# Altium PCB FRONT-UNIT.PcbDoc
Units mm, origin at the board's own origin, x right, y up, seen from the top; angles counter-clockwise.
Board outline 187.14 x 77.14 mm, 2 copper layers (Top Layer, Top, Bottom Layer, Bottom); 72 components, 64 nets, 317 pads, 87 vias.
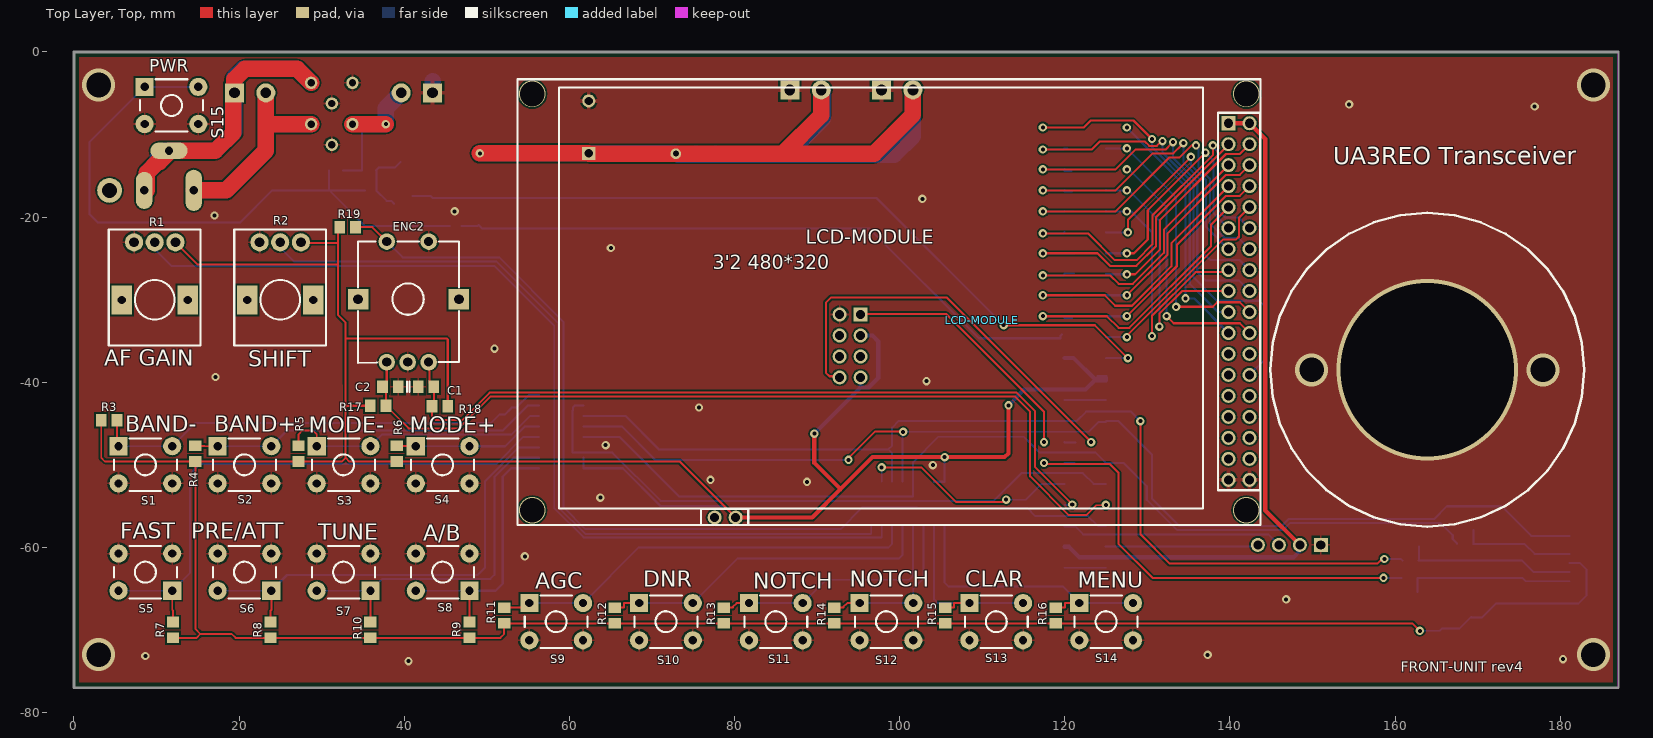
[diagram p0: Top Layer, Top view]
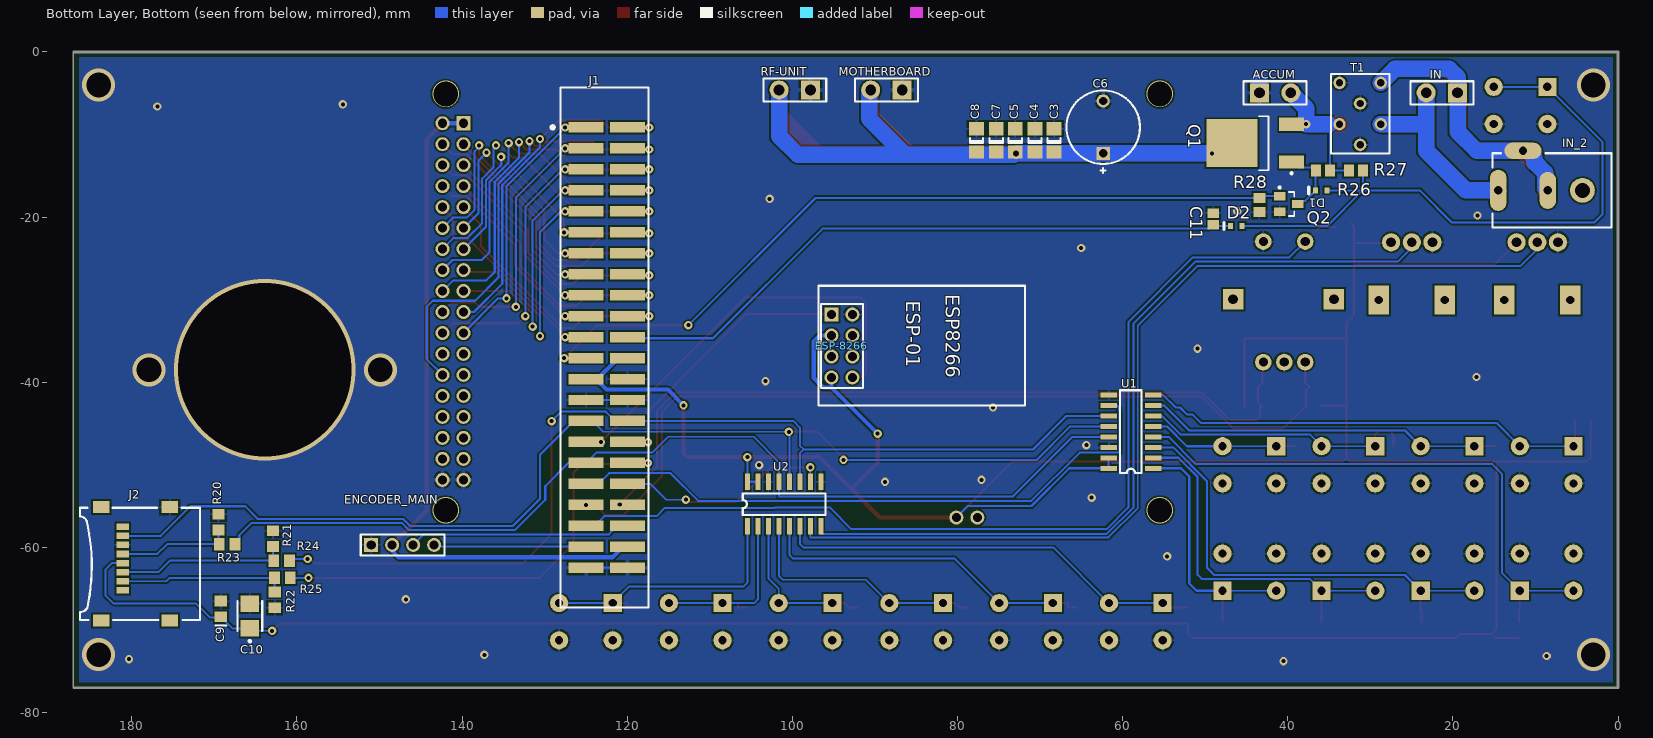
[diagram p1: Bottom Layer, Bottom view, seen from below]

## Layer stack, top to bottom
Top Solder, Top Mask: solder mask 0.0102, Solder Resist, Dk 3.5
Top Layer, Top: signal copper 0.0356
Dielectric 1: dielectric 0.32, FR-4, Dk 4.8
Bottom Layer, Bottom: signal copper 0.0356
Bottom Solder, Bot Mask: solder mask 0.0102, Solder Resist, Dk 3.5

## Board outline
-0.07,-77 ccw(c0,-77) 0,-77.07 ccw(c0,-77) 0.03,-77.064 ccw(c0,-77) 0.07,-77 0.07,0 ccw(c0,0) 0.03,0.064 ccw(c0,0) 0,0.07 187,0.07 cw(c187,0) 187.07,0 cw(c187,0) 187.064,-0.03 cw(c187,0) 187,-0.07 0,-0.07 cw(c0,0) -0.064,-0.03 cw(c0,0) -0.07,0 cw(c0,0) 0,0.07 0,0.064 187,0.064 cw(c187,0) 187.064,0 187.064,-77 ccw(c187,-77) 187,-76.936 0,-76.936 ccw(c0,-77) -0.064,-77 -0.064,0 cw(c0,0) 0,0.064 cw(c0,0) 0.064,0 0.064,-77 cw(c0,-77) 0,-77.064 187,-77.064 ccw(c187,-77) 187.064,-77 187.07,-77 ccw(c187,-77) 187.064,-76.97 ccw(c187,-77) 187,-76.93 0,-76.93 ccw(c0,-77) -0.064,-76.97 ccw(c0,-77)

## Design rules (kind name [scope] priority, off if disabled: settings)
BoardOutlineClearance [All] p1: gap=0.2 ignorepadtopadclearanceinfootprint=FALSE except(0.4: Arc-SplitBarrior Arc-SplitContinuation Track-SplitBarrior Track-SplitContinuation SMDPad-SplitBarrior SMDPad-SplitContinuation THPad-SplitBarrior THPad-SplitContinuation Via-SplitBarrior Via-SplitContinuation Fill-SplitBarrior Fill-SplitContinuation Poly-SplitBarrior Poly-SplitContinuation Region-SplitBarrior Region-SplitContinuation Text-SplitBarrior Text-SplitContinuation)
Clearance "Clearance Bottom Layer" [OnLayer('Bottom Layer')] p1: gap=0.203 ignorepadtopadclearanceinfootprint=TRUE except(0.254: Arc-Text Track-Text SMDPad-Text THPad-Text Via-Text Fill-Text Poly-Text Region-Text Text-Text)
Clearance "Clearance Top Layer" [OnLayer('Top Layer')] p2: gap=0.203 ignorepadtopadclearanceinfootprint=TRUE except(0.254: Arc-Text Track-Text SMDPad-Text THPad-Text Via-Text Fill-Text Poly-Text Region-Text Text-Text)
Clearance [All] p3: gap=0.2 ignorepadtopadclearanceinfootprint=FALSE except(0.089: Arc-Arc Arc-Track Arc-SMDPad Track-Track Track-SMDPad SMDPad-SMDPad; 0.127: Arc-Via Track-Via SMDPad-Via THPad-Via Via-Via; 0.254: Arc-Text Track-Text SMDPad-Text THPad-Text Via-Text Fill-Text Poly-Text Region-Text Text-Text)
HoleSize [All] p1: absolutevalues=TRUE maxlimit=2 minlimit=0.486 maxpercent=80.000 minpercent=20.000
MinimumAnnularRing [All] p1: minimumring=0.076
MinimumSolderMaskSliver [All] p1: minsoldermaskwidth=0.01
PolygonConnect PolygonConnect_1 [All] p1: thpad.connectstyle=Relief thpad.reliefconductorwidth=0.508 thpad.reliefentries=4 thpad.polygonreliefangle="90 Angle" thpad.airgapwidth=0.254 smdpad.connectstyle=Relief smdpad.reliefconductorwidth=0.508 smdpad.reliefentries=4 smdpad.polygonreliefangle="90 Angle" smdpad.airgapwidth=0.254 via.connectstyle=Direct via.reliefconductorwidth=0.508 via.reliefentries=4 via.polygonreliefangle="90 Angle" via.airgapwidth=0.254
RoutingCorners [All] p1: cornerstyle=Round minsetback=2.54 maxsetback=2.54
RoutingVias [All] p1: holewidth=0.5 width=1 viastyle="Through Hole" minholewidth=0.2 minwidth=0.45 maxholewidth=1 maxwidth=2
SilkToSilkClearance [All] p1: silktosilkclearance=0.1
SilkToSolderMaskClearance [IsPad] p1: minsilkscreentomaskgap=0.1 clearancetoexposedcopper=TRUE
SolderMaskExpansion [All] p1: expansion=0.102
Width [All] p1: maxlimit=2.54 minlimit=0.089 preferedwidth=0.381
25 further rules are at their usual default settings.

## Components (designator, comment, footprint, x,y, rotation, side; value= is the part's Value field where it differs from the comment)
ACCUM "JX2" JX2 41.529,-4.953 r180 bottom value=13.8V
C1 "CAP_0805" CAP_0805 42.431,-40.548 r0 top value=100n
C2 "CAP_0805" CAP_0805 38.531,-40.548 r180 top value=100n
C3 "CAP_1206" CAP_1206 68.3,-10.7 r90 bottom value=1uF
C4 "CAP_1206" CAP_1206 70.6,-10.7 r90 bottom value=100n
C5 "CAP_1206" CAP_1206 73,-10.7 r90 bottom value=1n
C6 "CAP250RP" CAP250RP 62.357,-9.652 r90 bottom value=100uF
C7 "CAP_1206" CAP_1206 75.3,-10.7 r90 bottom value=470pF
C8 "CAP_1206" CAP_1206 77.7,-10.7 r90 bottom value=120pF
C9 "CAP_0805" CAP_0805 169.2,-67.65 r90 bottom value=100n
C10 "EEEFC_sizeB" EEEFC_sizeB 165.7,-68.7 r90 bottom value=22uF
C11 "8.2n" CAPC2013X94X50LL20T25 49.022,-20.23 r270 bottom
D1 "1N4148WT-7" DIOD-SOD523-2_V 35.941,-16.764 r0 bottom
D2 "1N4148WT-7" DIOD-SOD523-2_V 46.228,-21.082 r0 bottom
ENC2 "PEC12" PEC12 40.521,-30.265 r180 top
ENCODER_MAIN "644456-4" 644456-4 147.19,-59.065 r180 bottom
ESP-8266 "ESP-01 ESP8266" "ESP-01 ESP8266" 84.328,-35.56 r270 bottom
IN "JX2" JX2 21.336,-4.953 r0 bottom value=13.8V
IN_2 "PJ-050B" PJ-050B 8.159,-16.114 r0 bottom value=13.8V
J1 "90131-0142" 90131-0142 123.392,-35.8 r270 bottom
J2 "0472190001" 0472190001 179,-61.995 r270 bottom value=MicroSD
LCD-MODULE "LCD-MODULE_3'2_480х320" LCD-MODULE-3.2-480-320 53.721,-3.3 r0 top value="HX8357B 480*320 3'2"
MOTHERBOARD "JX2" JX2 88.605,-4.6 r0 bottom value=13.8V
Q1 "IRFR9024NPBF" ONSC-DPAK-3-369C-01_V 43.936,-11.049 r0 bottom
Q2 "BSS123" FAIR-SOT23-3_V 39.878,-18.415 r270 bottom
R1 "AF GAIN" PTV09 9.766,-28.513 r180 top value="AF GAIN 1k"
R2 "SHIFT" PTV09 24.966,-28.513 r180 top value="SHIFT 1k"
R3 "RES_0805" RES_0805 4.25,-44.6 r180 top value=4.7k
R4 "RES_0805" RES_0805 14.7,-48.65 r270 top value=4.7k
R5 "RES_0805" RES_0805 27.2,-48.65 r270 top value=4.7k
R6 "RES_0805" RES_0805 39.1,-48.65 r270 top value=4.7k
R7 "RES_0805" RES_0805 12,-70 r270 top value=4.7k
R8 "RES_0805" RES_0805 23.8,-70 r270 top value=4.7k
R9 "RES_0805" RES_0805 47.9,-70 r270 top value=4.7k
R10 "RES_0805" RES_0805 35.9,-70 r270 top value=4.7k
R11 "RES_0805" RES_0805 52.1,-68.25 r270 top value=4.7k
R12 "RES_0805" RES_0805 65.5,-68.25 r270 top value=4.7k
R13 "RES_0805" RES_0805 78.7,-68.25 r270 top value=4.7k
R14 "RES_0805" RES_0805 92.1,-68.25 r270 top value=4.7k
R15 "RES_0805" RES_0805 105.5,-68.25 r270 top value=4.7k
R16 "RES_0805" RES_0805 118.9,-68.25 r270 top value=4.7k
R17 "RES_0805" RES_0805 36.831,-42.848 r180 top value=4.7k
R18 "RES_0805" RES_0805 44.323,-42.926 r0 top value=4.7k
R19 "RES_0805" RES_0805 33.147,-21.209 r180 top value=4.7k
R20 "RES_0805" RES_0805 169.5,-56.95 r270 bottom value=3.3k
R21 "RES_0805" RES_0805 162.9,-58.95 r270 bottom value=3.3k
R22 "RES_0805" RES_0805 162.7,-66.35 r90 bottom value=3.3k
R23 "RES_0805" RES_0805 168.45,-59.6 r180 bottom value=1.8k
R24 "RES_0805" RES_0805 161.85,-61.6 r180 bottom value=1.8k
R25 "RES_0805" RES_0805 161.75,-63.7 r180 bottom value=1.8k
R26 "30k" RESC2013X60X40NL20T25 35.726,-14.351 r180 bottom
R27 "30k" RESC2013X60X40NL20T25 31.75,-14.351 r0 bottom
R28 "30k" RESC2013X60X40NL20T25 43.434,-18.542 r90 bottom
RF-UNIT "JX2" JX2 99.7,-4.6 r0 bottom value=13.8V
S1 "BAND-" PTS645SK50LFS 8.65,-50 r0 top
S2 "BAND+" PTS645SK50LFS 20.65,-50 r0 top
S3 "MODE-" PTS645SK50LFS 32.65,-50 r0 top
S4 "MODE+" PTS645SK50LFS 44.65,-50 r0 top
S5 "FAST" PTS645SK50LFS 8.65,-63 r180 top
S6 "PRE/ATT" PTS645SK50LFS 20.65,-63 r180 top
S7 "TUNE" PTS645SK50LFS 32.65,-63 r180 top
S8 "A/B" PTS645SK50LFS 44.65,-63 r180 top
S9 "AGC" PTS645SK50LFS 58.4,-69 r0 top
S10 "DNR" PTS645SK50LFS 71.7,-69 r0 top
S11 "NOTCH" PTS645SK50LFS 85,-69 r0 top value=A=B
S12 "NOTCH" PTS645SK50LFS 98.4,-69 r0 top
S13 "CLAR" PTS645SK50LFS 111.7,-69 r0 top
S14 "MENU" PTS645SK50LFS 125,-69 r0 top
S15 "PWR" PTS645SK50LFS 11.811,-6.477 r0 top
T1 "TRANSF_ICORE" TRANSF_ICORE 31.242,-7.493 r270 bottom value=BNX016-01
U1 "MCP3008-I/SL" MCP3008-I/SL 59,-45.974 r0 bottom
U2 "MCP3008-I/SL" MCP3008-I/SL 101,-54.755 r90 bottom

## Footprints (in the part's own frame and the unit in brackets; to place one, negate y for a bottom-side part, rotate by r counter-clockwise, add the part's x,y. Pads: shape width x height; smd on the part's side, far side on the other; paste and mask are expansions set on the pad)
90131-0142 [mm]
  rect 1.27x4.24 smd: 1(-26.67,-1.582) 2(-26.67,3.428) 3(-24.13,-1.582) 4(-24.13,3.428) 5(-21.59,-1.582) 6(-21.59,3.428) 7(-19.05,-1.582) 8(-19.05,3.428) 9(-16.51,-1.582) 10(-16.51,3.428) 11(-13.97,-1.582) 12(-13.97,3.428) 13(-11.43,-1.582) 14(-11.43,3.428) 15(-8.89,-1.582) 16(-8.89,3.428) 17(-6.35,-1.582) 18(-6.35,3.428) 19(-3.81,-1.582) 20(-3.81,3.428) 21(-1.27,-1.582) 22(-1.27,3.428) 23(1.27,-1.582) 24(1.27,3.428) 25(3.81,-1.582) 26(3.81,3.428) 27(6.35,-1.582) 28(6.35,3.428) 29(8.89,-1.582) 30(8.89,3.428) 31(11.43,-1.582) 32(11.43,3.428) 33(13.97,-1.582) 34(13.97,3.428) 35(16.51,-1.582) 36(16.51,3.428) 37(19.05,-1.582) 38(19.05,3.428) 39(21.59,-1.582) 40(21.59,3.428) 41(24.13,-1.582) 42(24.13,3.428) 43(26.67,-1.582) 44(26.67,3.428)
  silkscreen extent -31.49,-5.98 31.49,5.98
644456-4 [mm]
  rect 1.7x1.7 hole 1.1: 1(-3.81,-0.635)
  round 1.7 hole 1.1: 2(-1.27,-0.635) 3(1.27,-0.635) 4(3.81,-0.635)
  silkscreen extent -5.08,-1.9 5.08,0.64
0472190001 [mm]
  rect 0.8x1.5 smd: 1(3.205,-2.1) 2(2.105,-2.1) 3(1.005,-2.1) 4(-0.095,-2.1) 5(-1.195,-2.1) 6(-2.295,-2.1) 7(-3.395,-2.1) 8(-4.495,-2.1)
  rect 1.45x2 smd: 9(-6.875,3.6) 10(-6.875,-4.7) 11(6.875,-4.7) 12(6.875,3.6)
  silkscreen extent -6.79,-7.25 6.79,7.25
CAP250RP [mm]
  rect 1.6x1.6 hole 1: 1(-2.631,0)
  round 1.6 hole 1: 2(3.719,0)
  silkscreen extent -4.99,-4.45 4.99,4.45
CAP_0805 [mm]
  rect 1.3x1.5 smd: 1(-0.75,0) 2(1.15,0)
  silkscreen extent -1.8,-0.65 -1.8,0.65
CAP_1206 [mm]
  rect 1.6x1.8 smd: 1(-1.4,0) 2(1.4,0)
  silkscreen extent -0.3,-0.8 0.3,0.8
CAPC2013X94X50LL20T25 [mm] "Chip Capacitor, 2-Leads, Body 2.01x1.25mm, IPC High Density"
  rect 1.15x1.35 smd: 1(-0.725,0) 2(0.725,0)
  body extent -1.1,-0.72 1.1,0.72, height 0.94
DIOD-SOD523-2_V [mm] "SOD523, 2-Leads, Body 1.2x0.8mm"
  rect 0.6x0.7 smd: 1(-0.7,0) 2(0.7,0)
  silkscreen extent 1.5,-0.4 1.5,0.4, body extent -0.8,-0.4 0.8,0.4, height 0.65
EEEFC_sizeB [mm]
  rect 2x2.2 smd: 1(-1.1,0) 2(1.9,0)
  silkscreen extent -2.9,-1.5 2.2,1.5
"ESP-01 ESP8266" [mm]
  round 1.7 hole 1.1: 1(-3.76,-8.4) 2(-1.22,-8.4) 3(1.32,-8.4) 4(3.86,-8.4) 6(-1.22,-10.94) 7(1.32,-10.94) 8(3.86,-10.94)
  rect 1.7x1.7 hole 1.1: 5(-3.76,-10.94)
  silkscreen extent -7.25,-12.5 7.25,12.5
FAIR-SOT23-3_V [mm] "SOT23, 3-Leads, Body 2.92x1.3mm, Pitch 0.95mm"
  rect 1x1.4 smd: 1(-0.95,-1.1) 2(0.95,-1.1) 3(0,1.1)
  silkscreen extent -2.12,-1.23 1.46,0.65, body extent -1.46,-0.65 1.46,0.65, height 1.2
JX2 [mm]
  rect 2.3x2.3 hole 1.3: 1(-1.905,0)
  round 2.3 hole 1.3: 2(1.905,0)
  silkscreen extent -3.81,-1.4 3.81,1.4
LCD-MODULE-3.2-480-320 [mm]
  rect 1.7x1.7 hole 1.1: 1(86.106,-5.334)
  round 1.7 hole 1.1: 2(88.646,-5.334) 3(86.106,-7.874) 4(88.646,-7.874) 5(86.106,-10.414) 6(88.646,-10.414) 7(86.106,-12.954) 8(88.646,-12.954) 9(86.106,-15.494) 10(88.646,-15.494) 11(86.106,-18.034) 12(88.646,-18.034) 13(86.106,-20.574) 14(88.646,-20.574) 15(86.106,-23.114) 16(88.646,-23.114) 17(86.106,-25.654) 18(88.646,-25.654) 19(86.106,-28.194) 20(88.646,-28.194) 21(86.106,-30.734) 22(88.646,-30.734) 23(86.106,-33.274) 24(88.646,-33.274) 25(86.106,-35.814) 26(88.646,-35.814) 27(86.106,-38.354) 28(88.646,-38.354) 29(86.106,-40.894) 30(88.646,-40.894) 31(86.106,-43.434) 32(88.646,-43.434) 33(86.106,-45.974) 34(88.646,-45.974) 35(86.106,-48.514) 36(88.646,-48.514) 37(23.876,-53.086) 38(26.416,-53.086)
  silkscreen extent 0,-54 90,0
MCP3008-I/SL [mm]
  rect 2x0.6 smd: 1(-2.7,4.445) 2(-2.7,3.175) 3(-2.7,1.905) 4(-2.7,0.635) 5(-2.7,-0.635) 6(-2.7,-1.905) 7(-2.7,-3.175) 8(-2.7,-4.445) 9(2.7,-4.445) 10(2.7,-3.175) 11(2.7,-1.905) 12(2.7,-0.635) 13(2.7,0.635) 14(2.7,1.905) 15(2.7,3.175) 16(2.7,4.445)
  silkscreen extent -1.3,-5 1.3,5
ONSC-DPAK-3-369C-01_V [mm] "DPAK, 3-Leads, Body 6.54x6.095mm, Pitch 2.29mm"
  rect 3x1.6 smd: 1(-4.4,2.29) 3(-4.4,-2.29)
  rect 6.2x5.8 smd: 4(2.8,0)
  silkscreen extent -4.52,-3.27 -0.45,3.76, body extent -1.6,-3.27 4.49,3.27, height 2.38
PEC12 [mm]
  round 2 hole 1.1: 1(-2.44,-7.302) 2(2.64,-7.302) 3(2.64,7.302) 4(0.1,7.302) 5(-2.44,7.302)
  rect 2.5x2.5 hole 1.2: 6(-6.1,-0.318) 7(6.1,-0.317)
  silkscreen extent -6.12,-7.32 6.12,7.38
PJ-050B [mm]
  oval 2x5 hole 1: 1(6.35,0.65)
  oval 2x4.5 hole 1: 2(0.35,0.65)
  oval 4.5x2 hole 1: 3(3.35,-4.15)
  round 3 hole 1.8: 4(-3.85,0.65)
  silkscreen extent -7.35,-3.85 7.05,5.15
PTS645SK50LFS [mm]
  rect 2.2x2.2 hole 1: 1(-3.25,2.25)
  round 2.2 hole 1: 2(3.25,2.25) 3(3.25,-2.25) 4(-3.25,-2.25)
  silkscreen extent -3.81,-3.17 3.81,3.18
PTV09 [mm]
  round 2.2 hole 1.2: 1(-2.515,-5.465) 2(-0.015,-5.465) 3(2.485,-5.465)
  rect 2.5x3.5 hole 1: 4(-4.015,1.535) 5(3.985,1.535)
  silkscreen extent -5.56,-7.03 5.56,7.03
RES_0805 [mm]
  rect 1.3x1.5 smd: 1(-0.95,0) 2(0.95,0)
RESC2013X60X40NL20T25 [mm] "Chip Resistor, 2-Leads, Body 2.00x1.25mm, IPC Medium Density"
  rect 1.2x1.45 smd: 1(-0.85,0) 2(0.85,0)
  body extent -1.1,-0.72 1.1,0.72, height 0.6
TRANSF_ICORE [mm]
  round 1.5 hole 0.9: LCG1(-1.25,0.01) LCG2(3.75,0.01) LCG3(-3.75,-2.49) LCP(1.25,-2.49) P(1.25,2.51) PSG(-3.75,2.51)
  silkscreen extent -4.81,-3.54 4.81,3.54

## Part data
C11: library part CMP-2007-04444-1, Manufacturer="AVX Interconnect / Elco", Part Number=08055C822KAT2A
D1 D2: library part CMP-2000-05518-1, "Surface Mount Fast Switching Diode, -65 to 150 degC, 2-Pin SOD523, RoHS, Tape and Reel", Forward Current=250mA, Manufacturer="Diodes Inc", Package Description="2-Pin Small Outline Diode, Body 1.2 x 0.8 mm", Package Reference=SOD523-2, Package Type=SOD-523, PartNumber=1N4148WT, Datasheet URL=http://www.diodes.com/_files/datasheets/ds30396.pdf, Datasheet Version="Rev. 16-2, 11/2015", Diode Configuration=Single, Manufacturer URL=http://www.diodes.com/, Mounting Technology=SurfaceMount, Mounting Type=SurfaceMount, Number of Elements per Chip=1, Package URL=http://www.diodes.com/_files/packages/SOD523.pdf, Pin Count=2
Q1: library part CMP-1058-00387-1, "IRFR9024NPBF, Транзистор, Р-канал 55В 11А", Manufacturer="On Semiconductor", Package Type="DPAK-3, IPAK-4", PartNumber=NTD2955G, Channel Polarity="P Channel", Ciss Typ (pF)=500, ComponentLink1Description="Manufacturer URL", ComponentLink1URL=http://www.onsemi.com/, ComponentLink2Description=Datasheet, ComponentLink2URL=http://www.onsemi.cn/pub_link/Collateral/NTD2955-D.PDF, ComponentLink3Description="Package Specification", ComponentLink3URL=http://www.onsemi.cn/pub_link/Collateral/369C.PDF, Configuration=Single, Coss Typ (pF)=150, Crss Typ (pF)=50, DatasheetVersion="Rev. 13", ID Max (A)=12, Mounting Technology="Surface Mount", PackageDescription="3-Pin Flange Mount, Body 6.54 x 6.095 mm, Pitch 2.29 mm", PackageReference=DPAK-3-369C-01, PackageVersion="Rev. E, 02/2014", Packing="Tape and Reel", PD Max (W)=55, Qrr Typ (nC)=100, RoHS=Pb-Free, V(BR)DSS Min (V)=60, VGS(th) Max (V)=4, VGS Max (V)=20
Q2: library part CMP-2000-04934-1, "N-Channel Logic Level Enhancement Mode Field Effect Transistor, 1.7 V, -55 to 150 degC, 3-Pin SOT-23, RoHS, Tape and Reel", Manufacturer=Fairchild, Maximum Continuous Drain Current=0.17A, Maximum Drain Source Voltage=100V, Maximum Gate Source Voltage=±20V, Operating Temperature=-55to150degC, Package=3SOT-23, Package Description="3-Pin Small Outline Transistor, Body 2.92 x 1.325 mm, Pitch 0.95 mm", Package Reference=SOT23-3, Package Version="Rev. 12, 03/2016", Category=MOSFET, Channel Mode=Enhancement, Channel Type=N, Datasheet URL=https://www.fairchildsemi.com/datasheets/BS/BSS123.pdf, Datasheet Version=Jun-03, Manufacturer URL=https://www.fairchildsemi.com/, Mounting=SurfaceMount, Package URL=http://www.fairchildsemi.com/dwg/MA/MA03D.pdf, Packaging=Tape&Reel, Rad Hard=No, RDS-on=6000@10VmOhm, Typical Fall Time=2.4ns, Typical Rise Time=9ns, Typical Turn-Off Delay Time=17ns, Typical Turn-On Delay Time=1.7ns
R1 R2: library part PTV09, "Adjustable Resistor PTV09"
R26 R27 R28: library part CMP-2001-00626-1, Manufacturer=Panasonic, Part Number=ERA-6AEB303V
S1 S2 S3 S4 S5 S6 S7 S8 S9 S10 S11 S12 S13 S14 S15: library part PTS645SK50LFS, "PTS645SK50LFS"
T1: "Transformer"
ENC2: FULLNAME="Выключатель замыкающий с приводом нажатием кнопки"

## Via types
v1: diameter 1.016, hole 0.486, Top Layer, Top to Bottom Layer, Bottom, tented both sides, 75 vias
v2: diameter 4, hole 3, Top Layer, Top to Bottom Layer, Bottom, 6 vias
v3: diameter 3.2, hole 3, Top Layer, Top to Bottom Layer, Bottom, 4 vias
v4: diameter 1.27, hole 0.711, Top Layer, Top to Bottom Layer, Bottom, tented both sides, 1 vias
v5: diameter 22, hole 21, Top Layer, Top to Bottom Layer, Bottom, 1 vias

## Nets (pads, with @x,y where several pads share a name; then routed paths per layer and width w, separated by ;. In a path a pad name is that pad's centre, name@x,y a point inside that pad or via, vN(x,y) a via of type N, cw(c..) or ccw(c..) an arc to the next point about the centre after c; other vN are vias at no path point)
+3V3: C9.1 C10.1 ESP-8266.6 ESP-8266.8 J1.24 J1.25 J2.4 LCD-MODULE.38 R1.1 R2.1 R3.2 R4.2 R5.2 R6.2 R7.2 R8.2 R9.2 R10.2 R11.2 R12.2 R13.2 R14.2 R15.2 R16.2 R17.2 R18.2 R19.2 U1.15 U1.16 U2.15 U2.16 | length 480
  Top Layer, Top w0.23: R3.2 3.3,-49.14 3.76,-49.6 R4.2 ; R7.2 14.854,-70.95 15.314,-70.49 ; R2.1@27.1,-23.114 32,-23.114 ; R19.2@31.873,-21.213 R19.2@32.323,-20.763 ; R19.2 32,-21.406 32,-23.114 ; R6.2 33.365,-49.6 32.905,-49.14 ; R14.2 R13.2 R12.2 R11.2 52.1,-70.49 51.64,-70.95 R9.2 R10.2 R8.2 19.569,-70.95 19.109,-70.49 15.314,-70.49 ; R15.2 R16.2 162.1,-69.2 v1(163,-70.1) ; R4.2 R5.2 32.445,-49.6 32.905,-49.14 ; R4.2 14.7,-69.876 15.314,-70.49 ; 32,-23.114 32,-25.726 32,-31.873 32.893,-32.766 32.893,-34.708 32.893,-40.26 32.905,-40.26 32.905,-42.848 32.905,-49.14
  Top Layer, Top w0.254: R1.1 14.986,-25.753 31.973,-25.753 32,-25.726 ; 32.893,-34.708 45.124,-34.708 45.273,-34.856 R18.2 ; 32.906,-42.848 R17.2 ; R6.2 73.351,-49.6 LCD-MODULE.38 ; R14.2 R15.2
  Top Layer, Top w0.5: LCD-MODULE.38 89.41,-56.386 92.844,-52.952 ; v1(89.662,-46.228) 89.662,-49.77 92.844,-52.952 ; v1(113.173,-42.797) 113.173,-48.611 112.713,-49.071 v1(105.445,-49.071) 96.725,-49.071 92.844,-52.952
  Bottom Layer, Bottom w0.23: U2.16 v1(105.445,-49.071) ; v1(163,-70.1) 165.4,-70.1 C10.1 167.8,-69.8 C9.1 169.3,-68.5 170.5,-68.5 172.2,-66.8 182.2,-66.8 183.2,-65.8 183.2,-62.7 182.4,-61.9 J2.4
  Bottom Layer, Bottom w0.254: U1.15 U1.16 66.464,-50.419 71.04,-54.996 78.747,-54.996 LCD-MODULE.38 ; U2.15 U2.16
  Bottom Layer, Bottom w0.5: v1(89.662,-46.228) 95.239,-40.651 ; ESP-8266.8 95.239,-39.449 95.239,-40.651 ; ESP-8266.6 96.697,-34.34 97.409,-35.052 97.409,-39.497 96.255,-40.651 95.239,-40.651 ; v1(113.173,-42.797) 115.071,-40.9 122.5,-40.9 J1.25@123.7,-39.7 ; J1.24 121.07,-37.07 J1.25@123.7,-39.7 ; J1.25@123.7,-39.7 123.8,-39.8 124.975,-39.8 J1.25 124.975,-39.4 124,-39.4 J1.25@123.7,-39.7
+5: ENCODER_MAIN.2 J1.42 LCD-MODULE.1 LCD-MODULE.2 | length 88.8
  Top Layer, Top w0.5: LCD-MODULE.1 LCD-MODULE.2 144.272,-10.539 144.272,-55.512 ENCODER_MAIN.2
  Bottom Layer, Bottom w0.5: J1.42 120.509,-59.93 121.779,-61.2 147.7,-61.2 148.5,-60.4 148.5,-60.361 148.46,-60.321 ENCODER_MAIN.2 ; LCD-MODULE.1 LCD-MODULE.2
+12: C3.1 C4.1 C5.1 C6.1 C7.1 C8.1 MOTHERBOARD.2 Q1.4 RF-UNIT.2 | length 136.7
  Top Layer, Top w2: v1(49.155,-12.283) C6.1 62.374,-12.3 v4(72.9,-12.3) 85.871,-12.3 ; MOTHERBOARD.2 90.51,-7.661 85.871,-12.3 ; RF-UNIT.2 101.605,-7.615 96.92,-12.3 85.871,-12.3
  Bottom Layer, Bottom w0.254: C5.1@72.817,-12.283 C5.1
  Bottom Layer, Bottom w1.6: C7.1@75.3,-12.45 C7.1 ; C8.1 C8.1@77.807,-12.45
  Bottom Layer, Bottom w2: v1(49.155,-12.283) C6.1 C5.1@72.817,-12.283 ; v4(72.9,-12.3) 73.188,-12.45 75.3,-12.45 77.807,-12.45 86.35,-12.45 ; MOTHERBOARD.2 90.7,-4.79 90.7,-8.1 86.35,-12.45 ; RF-UNIT.2 101.605,-10.195 99.35,-12.45 86.35,-12.45
CPU_PW_HOLD: J1.23 Q2.1 R28.2 | length 97.4
  Top Layer, Top w0.254: v1(112.598,-33.096) 123.647,-33.096 v1(127.635,-37.084)
  Bottom Layer, Bottom w0.254: Q2.1 43.207,-17.465 R28.2 97.194,-17.692 v1(112.598,-33.096) ; J1.23 124.989,-37.084 v1(127.635,-37.084)
CPU_PW_ON: C11.2 D2.2 J1.22 | length 78.8
  Bottom Layer, Bottom w0.254: D2.2 48.895,-21.082 C11.2 49.47,-21.403 96.333,-21.403 109.601,-34.671 119.497,-34.671 119.497,-34.356 J1.22@119.644,-34.209
GND: ACCUM.1 C1.1 C2.1 C3.2 C4.2 C5.2 C6.2 C7.2 C8.2 C9.2 C10.2 C11.1 ENC2.1 ENC2.4 ENCODER_MAIN.1 ESP-8266.1 J1.26 J1.27 J1.28 J1.43 J1.44 J2.6 J2.9 LCD-MODULE.35 LCD-MODULE.36 MOTHERBOARD.1 Q2.2 R1.3 R2.3 R20.1 R21.1 R22.1 R28.1 RF-UNIT.1 S1.3 S1.4 S2.3 S2.4 S3.3 S3.4 S4.3 S4.4 S5.3 S5.4 S6.3 S6.4 S7.3 S7.4 S8.3 S8.4 S9.3 S9.4 S10.3 S10.4 S11.3 S11.4 S12.3 S12.4 S13.3 S13.4 S14.3 S14.4 S15.3 S15.4 T1.LCG1 T1.LCG2 T1.LCG3 U1.9 U1.14 U2.9 U2.14 | length 10
  Bottom Layer, Bottom w0.23: J1.44 J1.43 ; J1.28 J1.27
  Bottom Layer, Bottom w2: 43.429,-3.551 43.434,-3.556
  other v1: 40.513,-73.787 180.34,-73.533 8.636,-73.152 137.287,-73.025 146.812,-66.294 54.61,-61.087 63.754,-53.975 88.773,-52.07 77.089,-51.816 104.013,-50.038 64.389,-47.625 75.692,-43.053 103.251,-39.878 17.145,-39.37 50.927,-35.941 65.024,-23.749 17.018,-19.812 46.101,-19.304 102.743,-17.78 176.911,-6.604 154.432,-6.35
  other v2: 3,-73 184,-73 149.9,-38.5 177.9,-38.5 3,-4 184,-4
  other v5: 163.9,-38.5
NetD1_1: D1.1 D2.1 R27.1 S15.1 S15.2 | length 78.9
  Bottom Layer, Bottom w0.254: S15.2 S15.1 1.905,-10.883 1.905,-19.685 2.867,-20.647 20.12,-20.647 24.003,-16.764 30.911,-16.764 ; R27.1 30.9,-16.753 30.911,-16.764 ; D1.1 30.911,-16.764 ; D2.1 35.229,-21.082 30.911,-16.764
NetD1_2: D1.2 Q1.1 Q2.3 R26.1 | length 8.7
  Bottom Layer, Bottom w0.254: Q2.3 38.405,-18.042 37.869,-18.042 36.641,-16.814 D1.2 36.641,-14.416 R26.1 36.915,-14.012 38.863,-14.012 Q1.1
NetESP-8266_4: ESP-8266.4 J1.31 | length 50
  Top Layer, Top w0.254: ESP-8266.4 92.586,-39.278 91.497,-39.278 91.059,-38.84 91.059,-30.375 91.716,-29.718 105.664,-29.718 v1(123.19,-47.244)
NetESP-8266_5: ESP-8266.5 J1.32 | length 32.2
  Top Layer, Top w0.254: ESP-8266.5 95.318,-31.75 105.664,-31.75 117.475,-43.561 v1(117.475,-47.244)
  Bottom Layer, Bottom w0.23: J1.32 119.965,-47.3 J1.32@121.3,-47.3
NetIN_1: IN.1 IN_2.2 IN_2.3 T1.PSG | length 64.4
  Top Layer, Top w2: IN_2.2 8.843,-16.764 8.843,-14.63 10.128,-13.345 10.316,-13.345 11.509,-12.152 IN_2.3 17.119,-11.964 19.304,-9.779 19.304,-5.207 19.431,-5.08 19.431,-3.302 20.701,-2.032 27.021,-2.032 T1.PSG
  Bottom Layer, Bottom w2: IN_2.2 8.843,-16.43 8.843,-14.63 10.128,-13.345 10.128,-12.771 10.935,-11.964 IN_2.3 17.119,-11.964 19.431,-9.652 19.431,-5.207 19.431,-3.048 20.447,-2.032 27.021,-2.032 T1.PSG
NetIN_2: IN.2 IN_2.1 T1.P | length 46.5
  Top Layer, Top w2: IN_2.1 18.415,-16.764 23.241,-11.938 23.241,-8.836 ; IN.2 23.241,-8.836 ; T1.P 23.334,-8.743 23.241,-8.836
  Bottom Layer, Bottom w2: IN_2.1 18.415,-16.764 23.241,-11.938 23.241,-8.796 ; IN.2 23.241,-8.796 ; T1.P 23.294,-8.743 23.241,-8.796
NetJ1_34: J1.34 R25.2 | length 55.5
  Top Layer, Top w0.254: v1(117.475,-49.784) 117.602,-49.911 125.476,-49.911 126.492,-50.927 126.492,-59.563 130.629,-63.7 v1(158.6,-63.7)
  Bottom Layer, Bottom w0.23: J1.34 121.2,-49.77 J1.34@121.2,-49.9 ; v1(158.6,-63.7) R25.2
NetJ1_35: J1.35 U1.10 | length 75.8
  Bottom Layer, Bottom w0.254: U1.10 60.673,-42.799 60.444,-43.028 60.444,-43.413 60.368,-43.489 60.368,-48.519 65.205,-48.519 71.047,-54.361 111.396,-54.361 114.749,-51.008 122.185,-51.008 123.487,-52.31 J1.35
VCC12_IN: ACCUM.2 Q1.3 R26.2 R27.2 T1.LCP | length 19.3
  Top Layer, Top w2: T1.LCP v1(37.78,-8.743)
  Bottom Layer, Bottom w0.254: R27.2 R26.2 34.876,-8.919 35.052,-8.743
  Bottom Layer, Bottom w2: 35.052,-8.743 v1(37.78,-8.743) 37.78,-6.797 ACCUM.2
"Сеть 1": R1.2 U2.7 | length 117.6
  Bottom Layer, Bottom w0.23: R1.2 9.781,-23.878 11.811,-25.908 50.908,-25.908 58.166,-33.166 58.166,-55.245 61.721,-58.8 97.825,-58.8 U2.7
"Сеть 2": R3.1 S1.1 S1.2 U1.8 | length 56.7
  Top Layer, Top w0.23: R3.1 5.2,-47.55 S1.1
  Bottom Layer, Bottom w0.23: S1.1 S1.2
  Bottom Layer, Bottom w0.254: S1.2 14.725,-44.925 50.521,-44.925 51.515,-43.931 52.178,-43.931 53.048,-43.061 53.586,-43.061 55.118,-41.529 U1.8
"Сеть 3": R4.1 S2.1 S2.2 U1.7 | length 43.7
  Top Layer, Top w0.23: R4.1 15.795,-47.7 15.845,-47.75 S2.1
  Bottom Layer, Bottom w0.23: S2.1 S2.2
  Bottom Layer, Bottom w0.254: S2.2 25.805,-45.845 51.945,-45.845 54.991,-42.799 U1.7
"Сеть 4": R5.1 S3.1 S3.2 U1.6 | length 33.8
  Top Layer, Top w0.23: R5.1 27.2,-46.305 27.66,-45.845 28.94,-45.845 29.4,-46.305 S3.1
  Bottom Layer, Bottom w0.23: S3.1 S3.2
  Bottom Layer, Bottom w0.254: S3.2 37.341,-46.309 53.005,-46.309 55.245,-44.069 U1.6
"Сеть 5": R6.1 S4.1 S4.2 U1.5 | length 18.2
  Top Layer, Top w0.23: R6.1 41.35,-47.7 S4.1
  Bottom Layer, Bottom w0.23: S4.1 S4.2
  Bottom Layer, Bottom w0.254: S4.2 52.213,-47.75 54.624,-45.339 U1.5
"Сеть 6": R7.1 S5.1 S5.2 U1.4 | length 69.5
  Top Layer, Top w0.23: S5.1 11.9,-67.565 12,-67.665 R7.1
  Bottom Layer, Bottom w0.23: S5.2 S5.1 14.058,-63.092 14.058,-51.093 14.518,-50.633
  Bottom Layer, Bottom w0.254: 14.518,-50.633 15.24,-49.911 51.132,-49.911 54.434,-46.609 U1.4
"Сеть 7": R8.1 S6.1 S6.2 U1.3 | length 56.1
  Top Layer, Top w0.23: R8.1 23.8,-67.665 23.9,-67.565 S6.1
  Bottom Layer, Bottom w0.23: S6.2 S6.1
  Bottom Layer, Bottom w0.254: S6.1 25.805,-63.345 48.885,-63.345 49.784,-62.446 49.784,-51.971 53.876,-47.879 U1.3
"Сеть 8": R10.1 S7.1 S7.2 U1.2 | length 44.3
  Top Layer, Top w0.23: R10.1 S7.1
  Bottom Layer, Bottom w0.23: S7.2 S7.1
  Bottom Layer, Bottom w0.254: S7.1 37.341,-63.809 50.436,-63.809 50.919,-63.327 50.919,-51.478 53.248,-49.149 U1.2
"Сеть 9": R9.1 S8.1 S8.2 U1.1 | length 32.4
  Top Layer, Top w0.23: R9.1 S8.1
  Bottom Layer, Bottom w0.23: S8.2 S8.1
  Bottom Layer, Bottom w0.254: S8.1 51.053,-65.25 51.935,-64.368 51.935,-51.41 52.926,-50.419 U1.1
"Сеть 10": R11.1 S9.1 S9.2 U2.6 | length 52.3
  Top Layer, Top w0.23: R11.1 54.6,-67.3 S9.1
  Bottom Layer, Bottom w0.23: S9.1 S9.2 68.364,-60.036 98.635,-60.036 99.095,-59.576 U2.6
"Сеть 12": R13.1 S11.1 S11.2 U2.4 | length 30.6
  Top Layer, Top w0.23: R13.1 79.795,-67.3 79.795,-67.21 80.255,-66.75 S11.1
  Bottom Layer, Bottom w0.23: S11.1 S11.2 91.084,-63.916 101.175,-63.916 101.635,-63.456 U2.4
"Сеть 13": R14.1 S12.1 S12.2 U2.3 | length 19.6
  Top Layer, Top w0.23: R14.1 93.195,-67.3 93.195,-67.21 93.655,-66.75 S12.1
  Bottom Layer, Bottom w0.23: S12.1 S12.2 101.65,-65.004 102.905,-63.749 U2.3
"Сеть 14": R15.1 S13.1 S13.2 U2.2 | length 23.3
  Top Layer, Top w0.23: R15.1 106.595,-67.3 106.595,-66.75 S13.1
  Bottom Layer, Bottom w0.23: U2.2 104.175,-66.29 104.635,-66.75 S13.1 S13.2
"Сеть 15": R2.2 U2.8 | length 100.5
  Bottom Layer, Bottom w0.23: R2.2 24.981,-23.711 26.67,-25.4 51.181,-25.4 53.267,-27.486 53.286,-27.486 58.674,-32.874 58.674,-55.119 61.925,-58.37 96.555,-58.37 U2.8
"Сеть 16": J2.2 R22.2 R25.1 | length 20.3
  Bottom Layer, Bottom w0.23: R22.2 R25.1 175.4,-63.7 175.8,-64.1 J2.2
"Сеть 17": R16.1 S14.1 S14.2 U2.1 | length 34
  Top Layer, Top w0.23: R16.1 120.005,-67.3 120.005,-66.75 S14.1
  Bottom Layer, Bottom w0.23: U2.1 105.445,-64.272 105.905,-64.733 119.733,-64.733 S14.1 S14.2
"Сеть 18": J1.1 LCD-MODULE.21 | length 30.6
  Bottom Layer, Bottom w0.254: v1(127.508,-9.144) 134.62,-16.256 v1(134.62,-29.845) 135.638,-29.845 LCD-MODULE.21
"Сеть 19": J1.2 LCD-MODULE.19 | length 40
  Top Layer, Top w0.254: v1(117.348,-9.144) 122.287,-9.144 123.122,-8.309 128.324,-8.309 v1(130.556,-10.541)
  Bottom Layer, Bottom w0.254: v1(130.556,-10.541) 130.556,-11.55 135.128,-16.122 135.128,-28.067 138.555,-31.494 LCD-MODULE.19
"Сеть 20": C2.2 ENC2.3 J1.37 R17.1 | length 107.8
  Top Layer, Top w0.23: ENC2.3@37,-37.5 37.881,-37.5 ENC2.3@38.065,-37.5 ; R17.1 37.781,-42.948 38.316,-43.483 38.416,-43.483 40.526,-45.593 46.609,-45.593 50.489,-41.713 113.913,-41.713 115.8,-43.6 115.8,-51.4 120.5,-56.1 122.6,-56.1 123.8,-54.9 124.975,-54.9 v1(124.975,-54.85)
  Top Layer, Top w0.254: R17.1 37.781,-40.948 C2.2 37.881,-40.048 ENC2.3
"Сеть 21": C1.2 ENC2.5 J1.38 R18.1 | length 97.6
  Top Layer, Top w0.23: ENC2.5@42.58,-36.88 43.114,-37.414 ENC2.5@43.2,-37.5 ; R18.1 43.373,-44.135 43.815,-44.577 47.017,-44.577 50.341,-41.253 114.153,-41.253 116.4,-43.5 116.4,-50.3 v1(120.9,-54.8)
  Top Layer, Top w0.254: ENC2.5 43.058,-37.665 43.058,-40.025 C1.2 43.581,-42.448 R18.1@43.081,-42.948
  Bottom Layer, Bottom w0.23: J1.38 120.9,-54.85 v1(120.9,-54.8)
"Сеть 22": ENC2.2 J1.39 R19.1 | length 121.2
  Top Layer, Top w0.254: R19.1 36.127,-21.209 ENC2.2
  Bottom Layer, Bottom w0.23: ENC2.2 39.81,-24.892 51.492,-24.892 59.309,-32.709 59.309,-55.146 61.948,-57.785 92.837,-57.785 95.432,-55.19 102.11,-55.19 102.147,-55.227 115.427,-55.227 116.4,-56.2 122.8,-56.2 123.99,-57.39 J1.39
"Сеть 23": J1.3 LCD-MODULE.20 | length 33.8
  Top Layer, Top w0.254: v1(133.477,-30.861) 137.922,-30.861 138.466,-30.317 141.19,-30.317 LCD-MODULE.20
  Bottom Layer, Bottom w0.254: J1.3 124.989,-11.684 v1(127.508,-11.684) 133.477,-17.653 v1(133.477,-30.861)
"Сеть 24": J1.4 LCD-MODULE.26 | length 55.8
  Top Layer, Top w0.254: v1(117.348,-11.811) 123.253,-11.811 124.215,-10.849 129.683,-10.849 130.21,-11.376 131.15,-11.376 131.529,-10.996 131.529,-10.842 131.483,-10.795 v1(131.826,-10.795)
  Bottom Layer, Bottom w0.23: J1.4 J1.4@120.33,-11.67
  Bottom Layer, Bottom w0.254: v1(117.348,-11.811) 119.824,-11.811 J1.4 ; v1(131.826,-10.795) 131.826,-12.178 135.582,-15.934 135.582,-27.305 138.408,-30.131 143.542,-30.131 144.272,-30.861 144.272,-37.209 LCD-MODULE.26
"Сеть 25": J1.5 LCD-MODULE.22 | length 30.8
  Top Layer, Top w0.254: v1(132.334,-32.004) 133.187,-32.857 141.19,-32.857 LCD-MODULE.22
  Bottom Layer, Bottom w0.254: v1(127.508,-14.224) 127.762,-14.224 132.334,-18.796 v1(132.334,-32.004)
"Сеть 26": J1.6 LCD-MODULE.18 | length 45.1
  Top Layer, Top w0.254: v1(117.348,-14.224) 126.149,-14.224 128.543,-11.83 132.188,-11.83 132.88,-11.138 132.88,-10.922 v1(133.096,-10.922)
  Bottom Layer, Bottom w0.23: J1.6 119.965,-14.4 J1.6@120.8,-14.4
  Bottom Layer, Bottom w0.254: v1(117.348,-14.224) 119.951,-14.224 J1.6 ; v1(133.096,-10.922) 133.096,-12.806 136.036,-15.746 136.036,-26.648 137.051,-27.663 141.076,-27.663 LCD-MODULE.18
"Сеть 27": J1.7 LCD-MODULE.17 | length 31.9
  Top Layer, Top w0.254: v1(131.445,-33.274) 131.445,-31.712 134.203,-28.954 LCD-MODULE.17
  Bottom Layer, Bottom w0.254: J1.7 124.989,-16.764 v1(127.508,-16.764) 127.762,-16.764 131.445,-20.447 v1(131.445,-33.274)
"Сеть 28": J1.8 LCD-MODULE.16 | length 44
  Top Layer, Top w0.254: v1(117.348,-16.764) 126.149,-16.764 130.629,-12.284 133.131,-12.284 134.15,-11.265 134.15,-11.049 v1(134.366,-11.049)
  Bottom Layer, Bottom w0.23: J1.8 119.965,-16.9 J1.8@120.9,-16.9
  Bottom Layer, Bottom w0.254: v1(117.348,-16.764) 119.951,-16.764 J1.8 ; v1(134.366,-11.049) 134.366,-13.434 136.652,-15.72 136.652,-24.257 137.592,-25.197 141.15,-25.197 LCD-MODULE.16
"Сеть 29": J1.9 LCD-MODULE.15 | length 33.2
  Top Layer, Top w0.254: v1(130.556,-34.417) 130.556,-31.959 135.845,-26.67 139.571,-26.67 LCD-MODULE.15
  Bottom Layer, Bottom w0.254: J1.9 124.989,-19.304 v1(127.508,-19.304) 128.016,-19.304 130.556,-21.844 v1(130.556,-34.417)
"Сеть 30": J1.10 LCD-MODULE.14 | length 41.8
  Top Layer, Top w0.254: v1(117.348,-19.304) 126.149,-19.304 132.68,-12.773 133.912,-12.773 135.382,-11.303 v1(135.89,-11.303)
  Bottom Layer, Bottom w0.23: J1.10 J1.10@121.01,-19.29
  Bottom Layer, Bottom w0.254: v1(117.348,-19.304) 119.951,-19.304 J1.10 ; v1(135.89,-11.303) 136.198,-11.611 136.198,-13.982 137.56,-15.344 137.56,-20.731 139.339,-22.511 141.004,-22.511 LCD-MODULE.14
"Сеть 31": J1.11 LCD-MODULE.13 | length 28
  Top Layer, Top w0.254: v1(127.635,-21.844) 127.635,-20.358 135.255,-12.738 v1(135.255,-12.7)
  Bottom Layer, Bottom w0.254: J1.11 124.989,-21.844 v1(127.635,-21.844) ; v1(135.255,-12.7) 135.255,-13.681 137.106,-15.532 137.106,-21.153 LCD-MODULE.13
"Сеть 32": J1.12 LCD-MODULE.12 | length 46
  Top Layer, Top w0.254: v1(117.348,-21.971) 122.809,-21.971 126.057,-25.219 128.698,-25.219 130.606,-23.31 130.606,-19.805 137.922,-12.489 v1(137.922,-11.303)
  Bottom Layer, Bottom w0.254: v1(117.348,-21.971) 119.824,-21.971 J1.12 ; v1(137.922,-11.303) 137.922,-11.468 138.468,-12.014 138.468,-19.099 139.435,-20.066 141.099,-20.066 LCD-MODULE.12
"Сеть 33": J1.13 LCD-MODULE.11 | length 29.5
  Top Layer, Top w0.254: v1(127.508,-24.384) 128.375,-24.384 130.048,-22.711 130.048,-19.177 137.027,-12.198 137.033,-12.198 v1(137.033,-12.192)
  Bottom Layer, Bottom w0.254: J1.13 124.989,-24.384 v1(127.508,-24.384) ; v1(137.033,-12.192) 138.014,-13.173 138.014,-19.521 LCD-MODULE.11
"Сеть 34": J1.14 LCD-MODULE.3 | length 35.1
  Top Layer, Top w0.254: v1(117.348,-24.384) 123.952,-24.384 125.476,-25.908 128.651,-25.908 131.06,-23.499 131.06,-19.993 139.827,-11.226 LCD-MODULE.3
  Bottom Layer, Bottom w0.23: J1.14 119.965,-24.4 J1.14@121.1,-24.4
  Bottom Layer, Bottom w0.254: v1(117.348,-24.384) 119.951,-24.384 J1.14
"Сеть 35": J1.15 LCD-MODULE.4 | length 26
  Top Layer, Top w0.254: v1(127.508,-26.924) 128.524,-26.924 131.54,-23.908 131.54,-20.337 139.525,-12.351 141.19,-12.351 LCD-MODULE.4
  Bottom Layer, Bottom w0.254: J1.15 124.989,-26.924 v1(127.508,-26.924)
"Сеть 36": J1.16 LCD-MODULE.5 | length 34.4
  Top Layer, Top w0.254: v1(117.348,-27.051) 125.476,-27.051 126.514,-28.089 128.241,-28.089 131.994,-24.336 131.994,-21.547 LCD-MODULE.5
  Bottom Layer, Bottom w0.23: J1.16 119.965,-26.8 J1.16@121.1,-26.8
  Bottom Layer, Bottom w0.254: v1(117.348,-27.051) 119.824,-27.051 J1.16
"Сеть 37": J1.17 LCD-MODULE.6 | length 25.4
  Top Layer, Top w0.254: v1(127.508,-29.464) 132.448,-24.524 132.448,-21.969 139.525,-14.891 141.19,-14.891 LCD-MODULE.6
  Bottom Layer, Bottom w0.254: J1.17 124.989,-29.464 v1(127.508,-29.464)
"Сеть 38": J1.18 LCD-MODULE.7 | length 34.2
  Top Layer, Top w0.254: v1(117.348,-29.464) 124.841,-29.464 126.111,-30.734 128.136,-30.734 132.902,-25.968 132.902,-23.179 LCD-MODULE.7
  Bottom Layer, Bottom w0.23: J1.18 119.965,-29.5 J1.18@120.9,-29.5
  Bottom Layer, Bottom w0.254: v1(117.348,-29.464) 119.951,-29.464 J1.18
"Сеть 39": J1.19 LCD-MODULE.8 | length 25.4
  Top Layer, Top w0.254: v1(127.508,-32.004) 133.59,-25.922 133.59,-23.367 139.525,-17.431 141.19,-17.431 LCD-MODULE.8
  Bottom Layer, Bottom w0.254: J1.19 124.989,-32.004 v1(127.508,-32.004)
"Сеть 40": J1.20 LCD-MODULE.9 | length 34.4
  Top Layer, Top w0.254: v1(117.348,-32.004) 125.095,-32.004 126.514,-33.423 127.808,-33.423 137.725,-23.506 137.725,-20.896 LCD-MODULE.9
  Bottom Layer, Bottom w0.23: J1.20 119.965,-32.2 J1.20@120.9,-32.2
  Bottom Layer, Bottom w0.254: v1(117.348,-32.004) 119.951,-32.004 J1.20
"Сеть 41": J1.21 LCD-MODULE.10 | length 25.4
  Top Layer, Top w0.254: v1(127.508,-34.544) 127.508,-34.365 139.176,-22.697 140.752,-22.697 141.097,-22.352 141.097,-20.064 LCD-MODULE.10
  Bottom Layer, Bottom w0.254: J1.21 124.989,-34.544 v1(127.508,-34.544)
"Сеть 44": J1.29 J2.7 U1.12 U2.12 | length 140.2
  Top Layer, Top w0.23: v1(93.8,-49.41) 93.8,-49.199 97.039,-45.96 v1@100.413,-45.96 ; v1@100.365,-46.008 v1@100.413,-45.96 ; v1(100.413,-46) v1@100.413,-45.96
  Bottom Layer, Bottom w0.23: 70.401,-49.41 v1(93.8,-49.41) ; U2.12 v1@100.365,-46.008 ; v1(100.413,-46) 122.9,-46 124.1,-44.8 124.975,-44.8 J1.29
  Bottom Layer, Bottom w0.254: U1.12 66.33,-45.339 70.401,-49.41 ; J1.29 126.46,-44.69 130.556,-48.786 130.556,-54.102 133.858,-57.404 146.286,-57.404 147.121,-56.569 164.719,-56.569 166.265,-55.023 172.894,-55.023 176.471,-58.6 J2.7
"Сеть 45": J1.30 R24.2 U1.11 U2.11 | length 124.1
  Top Layer, Top w0.254: v1(129.159,-44.704) 129.159,-58.42 132.715,-61.976 157.849,-61.976 158.425,-61.4 v1(158.7,-61.4)
  Bottom Layer, Bottom w0.23: 70.859,-48.14 98.635,-48.14 ; U2.11 99.095,-48.6 98.635,-48.14 ; J1.30 99.91,-44.69 99.095,-45.505 99.095,-47.68 98.635,-48.14 ; v1(158.7,-61.4) 160.7,-61.4 R24.2
  Bottom Layer, Bottom w0.254: U1.11 66.788,-44.069 70.859,-48.14 ; J1.30 121.45,-44.69 122.579,-43.561 128.016,-43.561 v1(129.159,-44.704)
"Сеть 49": J1.33 R23.2 U1.13 U2.13 | length 121.7
  Bottom Layer, Bottom w0.23: 73.298,-53.845 101.635,-53.845 U2.13 101.635,-49.665 104.7,-46.6 115,-46.6 116.9,-48.5 123.705,-48.5 J1.33
  Bottom Layer, Bottom w0.254: U1.13 66.062,-46.609 73.298,-53.845 ; J1.33 127.113,-49.77 129.921,-52.578 129.921,-54.229 133.604,-57.912 146.42,-57.912 147.309,-57.023 165.481,-57.023 166.977,-58.519 166.977,-58.977 167.5,-59.5 R23.2
"Сеть 51": J1.36 U2.10 | length 26.5
  Top Layer, Top w0.23: v1(97.825,-50.317) 102.617,-50.317 106.8,-54.5 v1@112.6,-54.5
  Bottom Layer, Bottom w0.23: U2.10 v1(97.825,-50.317) ; v1@112.6,-54.5 112.871,-54.229 v1(112.903,-54.229) 115.271,-54.229 117.19,-52.31 J1.36
"Сеть 52": ENCODER_MAIN.3 J1.40 | length 27
  Bottom Layer, Bottom w0.23: J1.40 119.965,-57.5 121.3,-57.5 122.22,-58.42 144.64,-58.42 ENCODER_MAIN.3
"Сеть 53": ENCODER_MAIN.4 J1.41 | length 18.6
  Bottom Layer, Bottom w0.23: J1.41 124.945,-59.9 143.18,-59.9 ENCODER_MAIN.4
"Сеть 59": R12.1 S10.1 S10.2 U2.5 | length 41.3
  Top Layer, Top w0.23: R12.1 66.595,-67.3 66.595,-66.75 S10.1
  Bottom Layer, Bottom w0.23: S10.1 S10.2 80.337,-61.363 99.905,-61.363 100.365,-60.903 U2.5
"Сеть 60": J2.3 R21.2 R24.1 | length 20.6
  Bottom Layer, Bottom w0.23: R21.2 162.9,-61.5 R24.1 175.4,-61.6 176.8,-63 J2.3
"Сеть 61": J2.5 R20.2 R23.1 | length 13.9
  Bottom Layer, Bottom w0.23: R20.2 169.5,-59.5 R23.1 169.5,-59.6 175.7,-59.6 176.9,-60.8 J2.5
pads on no net: ENC2.6 ENC2.7 ESP-8266.2 ESP-8266.3 ESP-8266.7 IN_2.4 J2.1 J2.8 J2.10 J2.11 J2.12 LCD-MODULE.23 LCD-MODULE.24 LCD-MODULE.25 LCD-MODULE.27 LCD-MODULE.28 LCD-MODULE.29 LCD-MODULE.30 LCD-MODULE.31 LCD-MODULE.32 LCD-MODULE.33 LCD-MODULE.34 LCD-MODULE.37 R1.4 R1.5 R2.4 R2.5
copper on no net:
  other v3: 55.499,-55.497 141.986,-55.497 55.499,-5.078 141.986,-5.078

## Polygon pours and split planes (outlines as drawn)
GND on Top Layer, Top "Top Layer, Top-GND" (solid, remove dead copper, pour order 0): 0.66,-0.66 186.34,-0.66 186.34,-76.34 0.66,-76.34
GND on Bottom Layer, Bottom "Bottom Layer, Bottom-GND" (solid, remove dead copper, pour order 2): 0.66,-0.66 186.34,-0.66 186.34,-76.34 0.66,-76.34

## Keep-outs
Keep-Out Layer, Board:
  lines w0.127: 0,-77 0,0 187,0 187,-77 0,-77
  lines w0.14: 0,-77 187,-77 187,0 0,0 0,-77

## Silkscreen, mask and mechanical layers (free items; w line width, h text height)
Top Overlay, Top Silk:
  lines w0.3: 144.9,-38.5 145.189,-35.201 146.046,-32.002 147.446,-29 149.345,-26.287 151.687,-23.945 154.4,-22.046 157.402,-20.646 160.601,-19.789 163.9,-19.5 167.199,-19.789 170.398,-20.646 173.4,-22.046 176.113,-23.945 178.455,-26.287 180.355,-29 181.754,-32.002 182.611,-35.201 182.9,-38.5 182.611,-41.799 181.754,-44.998 180.355,-48 178.455,-50.713 176.113,-53.055 173.4,-54.955 170.398,-56.354 167.199,-57.211 163.9,-57.5 160.601,-57.211 157.402,-56.354 154.4,-54.955 151.687,-53.055 149.345,-50.713 147.446,-48 146.046,-44.998 145.189,-41.799 144.9,-38.5
  text "UA3REO Transceiver" at 152.527,-13.589 h2.08
  text "FRONT-UNIT rev4" at 160.665,-75.046 h1.25

## Text inside footprints (layer, text, board x,y; h text height)
ENCODER_MAIN: Mechanical 2, Bot Assy "BOARD EDGE" at 149.397,-58.064 h0.42
ESP-8266: Bottom Overlay, Bot Silk "ESP8266" at 81.402,-29.347 h1.67 r90; Bottom Overlay, Bot Silk "ESP-01" at 86.182,-30.119 h1.67 r90
LCD-MODULE: Top Overlay, Top Silk "3'2 480*320" at 77.343,-26.289 h1.67